# EAGLE board CT_schematic (EAGLE 7.6.0)

Size 100 x 80 mm. Coordinates in mm from the lower left corner, seen from the top.
Outline: 0,0 100,0 100,80 0,80 0,0
Copper layers (1*16): Top 0.035mm / dielectric 1.5mm / Bottom 0.035mm
Design rules "default": minimum track width 10mil, minimum drill 24mil, track to track 8mil, track to pad 8mil, pad to pad 8mil, via to via 8mil, smd to smd 8mil, copper to edge 40mil, drill to drill 8mil, minimum pad ring 10mil, minimum via ring 8mil, stop-mask expansion 4mil, vias tented up to drill 0mil, thermal gap 10mil

## Footprints (pad centres in the part's own frame; a part is rotated, then mirrored left to right if it is on the bottom)
C0603 = smd 0.8 x 0.8: 1 -0.762,0; 2 0.762,0
C0402 = smd 0.5 x 0.5: 1 -0.508,0; 2 0.508,0
C1206 = smd 1.3 x 1.6: 1 -1.524,0; 2 1.524,0
C0805 = smd 1.2 x 1.3: 1 -1.016,0; 2 1.016,0
C1210 = smd 1.2 x 2.5: 1 -1.524,0; 2 1.524,0
EXV-9H = smd 3.505 x 1.676: 1 -2.857,0; 2 2.857,0
L0603 = smd 0.8 x 0.8: 1 -0.762,0; 2 0.762,0
PJ-037B_PACKAGE = drill 3.7 square: 1 12,0 | drill 3.2 square: 2 6,0
R0603 = smd 0.8 x 0.8: 1 -0.762,0; 2 0.762,0
TFBGA64 = smd 0.35 x 0.35: A1 -1.75,1.75; A2 -1.25,1.75; A3 -0.75,1.75; A4 -0.25,1.75; A5 0.25,1.75; A6 0.75,1.75; A7 1.25,1.75; A8 1.75,1.75; B1 -1.75,1.25; B2 -1.25,1.25; B3 -0.75,1.25; B4 -0.25,1.25; B5 0.25,1.25; B6 0.75,1.25; B7 1.25,1.25; B8 1.75,1.25; C1 -1.75,0.75; C2 -1.25,0.75; C3 -0.75,0.75; C4 -0.25,0.75; C5 0.25,0.75; C6 0.75,0.75; C7 1.25,0.75; C8 1.75,0.75; D1 -1.75,0.25; D2 -1.25,0.25; D3 -0.75,0.25; D4 -0.25,0.25; D5 0.25,0.25; D6 0.75,0.25; D7 1.25,0.25; D8 1.75,0.25; E1 -1.75,-0.25; E2 -1.25,-0.25; E3 -0.75,-0.25; E4 -0.25,-0.25; E5 0.25,-0.25; E6 0.75,-0.25; E7 1.25,-0.25; E8 1.75,-0.25; F1 -1.75,-0.75; F2 -1.25,-0.75; F3 -0.75,-0.75; F4 -0.25,-0.75; F5 0.25,-0.75; F6 0.75,-0.75; F7 1.25,-0.75; F8 1.75,-0.75; G1 -1.75,-1.25; G2 -1.25,-1.25; G3 -0.75,-1.25; G4 -0.25,-1.25; G5 0.25,-1.25; G6 0.75,-1.25; G7 1.25,-1.25; G8 1.75,-1.25; H1 -1.75,-1.75; H2 -1.25,-1.75; H3 -0.75,-1.75; H4 -0.25,-1.75; H5 0.25,-1.75; H6 0.75,-1.75; H7 1.25,-1.75; H8 1.75,-1.75
DFN8-S = smd 0.6 x 0.4: 1 -2.69,1.905; 2 -2.69,0.635; 3 -2.69,-0.635; 4 -2.69,-1.905; 5 2.69,-1.905; 6 2.69,-0.635; 7 2.69,0.635; 8 2.69,1.905
QFN-32 = smd 0.6 x 0.3: 1 -2.3,1.75; 2 -2.3,1.25; 3 -2.3,0.75; 4 -2.3,0.25; 5 -2.3,-0.25; 6 -2.3,-0.75; 7 -2.3,-1.25; 8 -2.3,-1.75; 17 2.3,-1.75; 18 2.3,-1.25; 19 2.3,-0.75; 20 2.3,-0.25; 21 2.3,0.25; 22 2.3,0.75; 23 2.3,1.25; 24 2.3,1.75 | smd 0.3 x 0.6: 9 -1.75,-2.3; 10 -1.25,-2.3; 11 -0.75,-2.3; 12 -0.25,-2.3; 13 0.25,-2.3; 14 0.75,-2.3; 15 1.25,-2.3; 16 1.75,-2.3; 25 1.75,2.3; 26 1.25,2.3; 27 0.75,2.3; 28 0.25,2.3; 29 -0.25,2.3; 30 -0.75,2.3; 31 -1.25,2.3; 32 -1.75,2.3 | smd 3.2 x 3.2: EXP 0,0
SJ-43515TS-SMT-TR = smd 2.2 x 3: 1 0.6,-7.4; 4 3.4,-7.4 | smd 3 x 3: 2 12.8,-7.4; 5 17,-3 | smd 2 x 3: 3 5.3,0; 6 2.5,0 | drill 1.8: P$7 4.5,-3.69; P$8 11.54,-3.69
WM-64PC = drill 0.6 pad 1: 1 -1,0.95; 2 -1,-0.95
ABLS-25.000MHZ-B2F-T = smd 5.6 x 2.8: 1 -3.81,0; 2 5.69,0
ASEK = smd 1.4 x 1: 1 -1.1,-0.8; 2 1.1,-0.8; 3 1.1,0.8; 4 -1.1,0.8
ASFL1 = smd 1.7 x 1.5: 1 -1.27,-1.1; 2 1.27,-1.1; 3 1.27,1.1; 4 -1.27,1.1
WSON-8 = smd 0.3 x 0.6: 1 -0.75,0; 2 0.05,0; 3 0.85,0; 4 1.65,0; 5 1.65,3.8; 6 0.85,3.8; 7 0.05,3.8; 8 -0.75,3.8 | smd 3 x 2.6: PAD 0.45,1.9
SON-6 = smd 0.55 x 0.3: 1 -0.355,0.5 | smd 0.52 x 0.3: 2 -0.37,0; 3 -0.37,-0.5; 4 0.37,-0.5; 5 0.37,0; 6 0.37,0.5
SW_4-1437565-2 = smd 1.4 x 2.1: 1 -2.23,4.55; 2 -2.23,-4.55; 3 2.23,4.55; 4 2.23,-4.55
LGM67K-G1J2-24-Z = smd 0.8 x 1.4: A -2,0; C 0,0
NC7SZ125M5X = smd 1.3 x 0.7: 1 -1.3,0.95; 2 -1.3,0; 3 -1.3,-0.95; 4 1.3,-0.95; 5 1.3,0.95

## Placement (x,y rotation side)
C1  1e-07  [C0603]  -48.26,67.31 0 top  (outside the outline)
C2  1e-07  [C0603]  -52.07,67.31 0 top  (outside the outline)
C3  1e-07  [C0603]  -55.88,67.31 0 top  (outside the outline)
C4  1e-07  [C0603]  -59.69,67.31 0 top  (outside the outline)
C5  4.7e-06  [C0603]  -44.45,67.31 0 top  (outside the outline)
C6  1e-07  [C0603]  -63.5,67.31 0 top  (outside the outline)
C7  1e-08  [C0603]  -67.31,67.31 0 top  (outside the outline)
C8  1e-06  [C0603]  -71.12,67.31 0 top  (outside the outline)
C9  1e-07  [C0603]  -74.93,67.31 0 top  (outside the outline)
C10  1e-11  [C0402]  -26.67,77.47 0 top  (outside the outline)
C11  1e-11  [C0402]  -30.48,77.47 0 top  (outside the outline)
C12  1e-08  [C0402]  -34.29,77.47 0 top  (outside the outline)
C13  1e-06  [C0603]  -15.24,72.39 0 top  (outside the outline)
C14  1e-06  [C0603]  -19.05,72.39 0 top  (outside the outline)
C15  1e-06  [C0603]  -22.86,72.39 0 top  (outside the outline)
C16  1e-06  [C0603]  -26.67,72.39 0 top  (outside the outline)
C17  1e-06  [C0603]  -30.48,72.39 0 top  (outside the outline)
C18  1e-06  [C0603]  -34.29,72.39 0 top  (outside the outline)
C19  1e-06  [C0603]  -38.1,72.39 0 top  (outside the outline)
C20  1e-07  [C0402]  -38.1,77.47 0 top  (outside the outline)
C21  1e-07  [C0402]  -41.91,77.47 0 top  (outside the outline)
C22  1e-07  [C0402]  -45.72,77.47 0 top  (outside the outline)
C23  1e-07  [C0402]  -49.53,77.47 0 top  (outside the outline)
C24  1e-06  [C0603]  -41.91,72.39 0 top  (outside the outline)
C25  1e-08  [C0402]  -53.34,77.47 0 top  (outside the outline)
C26  1e-08  [C0402]  -57.15,77.47 0 top  (outside the outline)
C27  1e-08  [C0402]  -60.96,77.47 0 top  (outside the outline)
C28  1e-05  [C1206]  -35.56,59.69 0 top  (outside the outline)
C29  1e-05  [C0805]  -53.34,59.69 0 top  (outside the outline)
C30  1e-08  [C0402]  -64.77,77.47 0 top  (outside the outline)
C31  1e-05  [C1206]  -41.91,59.69 0 top  (outside the outline)
C32  1e-05  [C1210]  -29.21,60.96 0 top  (outside the outline)
C33  1e-07  [C0402]  -68.58,77.47 0 top  (outside the outline)
C34  0.0001  [EXV-9H]  -38.1,53.34 0 top  (outside the outline)
C35  0.0001  [EXV-9H]  -49.53,53.34 0 top  (outside the outline)
C36  1e-08  [C0402]  -72.39,77.47 0 top  (outside the outline)
F1  240.0  [L0603]  -45.72,72.39 0 top  (outside the outline)
J1  PJ-037B  [PJ-037B_PACKAGE]  -55.88,21.59 0 top  (outside the outline)
R2  1000.0  [R0603]  -49.53,72.39 0 top  (outside the outline)
R4  4700.0  [R0603]  -53.34,72.39 0 top  (outside the outline)
R5  2200.0  [R0603]  -57.15,72.39 0 top  (outside the outline)
R6  2200.0  [R0603]  -60.96,72.39 0 top  (outside the outline)
R7  10000.0  [R0603]  -15.24,67.31 0 top  (outside the outline)
R8  10000.0  [R0603]  -20.32,67.31 0 top  (outside the outline)
R9  10000.0  [R0603]  -25.4,67.31 0 top  (outside the outline)
R10  10000.0  [R0603]  -30.48,67.31 0 top  (outside the outline)
R11  1270.0  [R0603]  -64.77,72.39 0 top  (outside the outline)
R12  1270.0  [R0603]  -68.58,72.39 0 top  (outside the outline)
R13  100000.0  [R0603]  -58.42,59.69 0 top  (outside the outline)
R14  200.0  [R0603]  -72.39,72.39 0 top  (outside the outline)
R15  1000.0  [R0603]  -76.2,72.39 0 top  (outside the outline)
R16  100000.0  [R0603]  -63.5,59.69 0 top  (outside the outline)
R17  2231.0  [R0603]  -15.24,77.47 0 top  (outside the outline)
R18  1000.0  [R0603]  -19.05,77.47 0 top  (outside the outline)
R19  10000.0  [R0603]  -35.56,67.31 0 top  (outside the outline)
R20  10000.0  [R0603]  -40.64,67.31 0 top  (outside the outline)
R21  9100.0  [R0603]  -22.86,77.47 0 top  (outside the outline)
R22  680000.0  [R0603]  -68.58,59.69 0 top  (outside the outline)
R23  120000.0  [R0603]  -73.66,59.69 0 top  (outside the outline)
U1  STM32L073RBH6  [TFBGA64]  -63.5,34.29 0 top  (outside the outline)
U2  24AA256-I/MF  [DFN8-S]  -33.02,34.29 0 top  (outside the outline)
U3  SGTL5000XNAA3  [QFN-32]  -46.99,34.29 0 top  (outside the outline)
U4  SJ-43515TS-SMT-TR  [SJ-43515TS-SMT-TR]  -39.37,10.16 0 top  (outside the outline)
U5  SJ-43515TS-SMT-TR  [SJ-43515TS-SMT-TR]  -67.31,10.16 0 top  (outside the outline)
U6  SJ-43515TS-SMT-TR  [SJ-43515TS-SMT-TR]  -39.37,24.13 0 top  (outside the outline)
U7  WM-64PCT  [WM-64PC]  -20.32,34.29 0 top  (outside the outline)
U8  ABLS-25.000MHZ-B2F-T  [ABLS-25.000MHZ-B2F-T]  -68.58,53.34 0 top  (outside the outline)
U9  ASEK-32.768KHz-ECST  [ASEK]  -29.21,53.34 0 top  (outside the outline)
U10  ASFL-24.57MHZ-NCS  [ASFL1]  -68.58,44.45 0 top  (outside the outline)
U11  LP3878SDX-ADJ/NOPB  [WSON-8]  -30.48,41.91 0 top  (outside the outline)
U12  LP3878SDX-ADJ/NOPB  [WSON-8]  -50.8,41.91 0 top  (outside the outline)
U13  TPS3895ADRYR  [SON-6]  -74.93,76.2 0 top  (outside the outline)
U14  4-1437565-2  [SW_4-1437565-2]  -72.39,21.59 0 top  (outside the outline)
U15  Q65110A2395  [LGM67K-G1J2-24-Z]  -17.78,60.96 0 top  (outside the outline)
U16  nc7sz125m5x  [NC7SZ125M5X]  -46.99,59.69 0 top  (outside the outline)

## Library data of the parts
C1-C36 F1 J1 R2 R4-R23 U1-U16 = circuit_tree

## Nets
CLK_CRYSTAL_U1_C1: C10.1 U1.C1 U8.1
CLK_CRYSTAL_U1_D1: C11.1 U1.D1 U8.2
CLK_U1_A1: U1.A1 U9.3
CLK_U3_21: U3.21 U10.3
GND: C1.2 C2.2 C3.2 C4.2 C5.2 C6.2 C7.2 C8.2 C9.2 C10.2 C11.2 C12.2 C20.2 C21.2 C22.2 C23.2 C24.2 C25.2 C26.2 C27.2 C28.2 C29.2 C30.2 C31.2 C32.2 C33.2 C34.2 C35.2 C36.2 J1.2 R2.2 R7.2 R8.2 R9.2 R12.2 R15.2 R18.2 R21.2 R23.2 U1.C2 U1.D4 U1.D5 U1.D6 U1.F1 U2.4 U3.1 U3.3 U3.7 U3.EXP U5.1 U6.1 U7.2 U9.2 U10.2 U11.3 U11.PAD U12.3 U12.PAD U13.2 U15.C U16.1 U16.3
NET_U1_A3: R6.1 U1.A3 U2.5
NET_U1_B2: C6.1 U1.B2
NET_U1_B3: R5.1 U1.B3 U2.6
NET_U1_B4: R7.1 U1.B4
NET_U1_E1: R4.1 U1.E1 U16.4
NET_U1_H1: C7.1 C8.1 F1.1 U1.G1 U1.H1
NET_U1_H6: U15.A
NET_U1_H7: U14.3 U14.4
NET_U2_1: R8.1 U2.1
NET_U2_2: R9.1 U2.2
NET_U2_3: R10.1 U2.3
NET_U3_10: C23.1 U3.10
NET_U3_29: R11.1 U3.29
NET_U3_31: R12.1 U3.31
NET_U4_1: U3.4 U4.1
NET_U4_2: U3.2 U4.2
NET_U4_5: U3.6 U4.5
NET_U5_2: C14.1 U5.2
NET_U5_5: C13.1 U5.5
NET_U5_11: C14.2
NET_U5_12: C13.2
NET_U6_2: C16.1 C17.1 U6.2
NET_U6_5: C15.1 U6.5
NET_U6_13: C16.2 C17.2
NET_U6_14: C15.2
NET_U7_1: C18.1 C19.1 C24.1 U3.16 U7.1
NET_U7_15: C18.2 C19.2
NET_U11_1: C27.1 U11.1
NET_U11_6: R14.2 R15.1 U11.6
NET_U11_8: R13.1 U11.8
NET_U12_1: C30.1 U12.1
NET_U12_6: R17.2 R18.1 U12.6
NET_U12_8: R16.1 U12.8
NET_U13_1: R20.1 R21.1 U13.1
NET_U13_3: R22.2 R23.1 U13.3
NET_U13_4: R19.1 U13.4 U16.2
NET_U14_1: R2.1 U14.1 U14.2
PROC_I2S2_CK: U1.G8 U3.24
PROC_I2S2_SD: U1.F7 U3.26
PROC_I2S2_WS: U1.H8 U3.23
VCC_S1_7V5: C28.1 C31.1 C34.1 C35.1 J1.1 R13.2 R16.2 U11.4 U12.4
VCC_TIER1_1V2: C20.1 C29.1 R14.1 U3.30 U11.5
VCC_TIER1_3V3: C1.1 C2.1 C3.1 C4.1 C5.1 C9.1 C12.1 C21.1 C22.1 C25.1 C26.1 C32.1 C33.1 C36.1 F1.2 R4.2 R5.2 R6.2 R10.2 R11.2 R17.1 R19.2 R20.2 R22.1 U1.D2 U1.E4 U1.E5 U1.E6 U2.7 U2.8 U3.5 U3.20 U9.4 U10.4 U12.5 U13.6 U16.5

## Tracks (layer width: path | path; a pad name or v marks a point on that pad's centre or on a via)
CLK_CRYSTAL_U1_C1  (2 unrouted)
CLK_CRYSTAL_U1_D1  (2 unrouted)
CLK_U1_A1  (1 unrouted)
CLK_U3_21  (1 unrouted)
GND  (61 unrouted)
NET_U1_A3  (2 unrouted)
NET_U1_B2  (1 unrouted)
NET_U1_B3  (2 unrouted)
NET_U1_B4  (1 unrouted)
NET_U1_E1  (2 unrouted)
NET_U1_H1  (4 unrouted)
NET_U1_H7  (1 unrouted)
NET_U2_1  (1 unrouted)
NET_U2_2  (1 unrouted)
NET_U2_3  (1 unrouted)
NET_U3_10  (1 unrouted)
NET_U3_29  (1 unrouted)
NET_U3_31  (1 unrouted)
NET_U4_1  (1 unrouted)
NET_U4_2  (1 unrouted)
NET_U4_5  (1 unrouted)
NET_U5_2  (1 unrouted)
NET_U5_5  (1 unrouted)
NET_U6_2  (2 unrouted)
NET_U6_5  (1 unrouted)
NET_U6_13  (1 unrouted)
NET_U7_1  (4 unrouted)
NET_U7_15  (1 unrouted)
NET_U11_1  (1 unrouted)
NET_U11_6  (2 unrouted)
NET_U11_8  (1 unrouted)
NET_U12_1  (1 unrouted)
NET_U12_6  (2 unrouted)
NET_U12_8  (1 unrouted)
NET_U13_1  (2 unrouted)
NET_U13_3  (2 unrouted)
NET_U13_4  (2 unrouted)
NET_U14_1  (2 unrouted)
PROC_I2S2_CK  (1 unrouted)
PROC_I2S2_SD  (1 unrouted)
PROC_I2S2_WS  (1 unrouted)
VCC_S1_7V5  (8 unrouted)
VCC_TIER1_1V2  (4 unrouted)
VCC_TIER1_3V3  (36 unrouted)